# EAGLE board RotaryEncoder_Breakout (EAGLE 6.5.0)
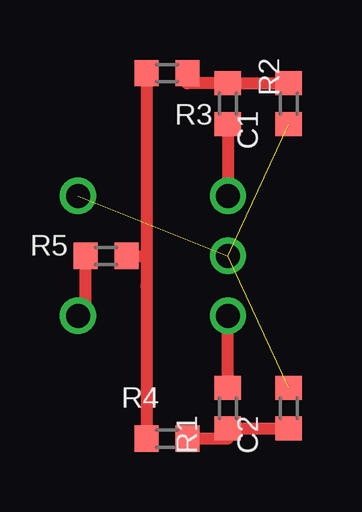
[diagram p0: board, top side]
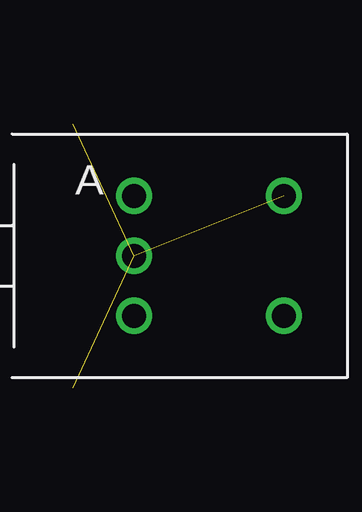
[diagram p1: board, bottom side, seen from below]

No outline drawn. Coordinates in mm, seen from the top.
Copper layers (1*16): Top 0.035mm / dielectric 1.5mm / Bottom 0.035mm
Design rules "default": minimum track width 10mil, minimum drill 24mil, track to track 8mil, track to pad 8mil, pad to pad 8mil, via to via 8mil, smd to smd 8mil, copper to edge 40mil, drill to drill 8mil, minimum pad ring 10mil, minimum via ring 8mil, stop-mask expansion 4mil, vias tented up to drill 0mil, thermal gap 10mil

## Footprints (pad centres in the part's own frame; a part is rotated, then mirrored left to right if it is on the bottom)
0603 = smd 1 x 1.1: 1 -0.85,0; 2 0.85,0
PEC092320FS = drill 1: A 0,-2.5; B 0,2.5; C 0,0; D -6.25,-2.5; E -6.25,2.5

## Placement (x,y rotation side)
C1  10nF  [0603]  2.54,6.35 90 top
C2  10nF  [0603]  2.54,-6.35 90 top
ENC1  PEC09  [PEC092320FS]  0,0 180 bottom
R1  10k  [0603]  0,-6.35 90 top
R2  10k  [0603]  0,6.35 270 top
R3  10k  [0603]  -2.54,7.62 180 top
R4  10k  [0603]  -2.54,-7.62 0 top
R5  10k  [0603]  -5.08,0 0 top

## Library data of the parts
C1 C2 R1-R5 = rlc-jqi
ENC1 = connector-jqi

## Nets
ENC_A: C1.2 R2.1 R3.1
ENC_B: C2.1 R1.1 R4.2
ENC_SW: ENC1.E R5.1
GND: C1.1 C2.2 ENC1.C ENC1.D
N$4: ENC1.B R1.2
N$5: ENC1.A R2.2
V+: R3.2 R4.1 R5.2

## Tracks (layer width: path | path; a pad name or v marks a point on that pad's centre or on a via)
ENC_A
  Top 0.508: C1.2 R2.1 -1.69,7.2 R3.1
ENC_B
  Top 0.508: R4.2 0,-7.62 R1.1 C2.1
ENC_SW
  Top 0.508: ENC1.E -5.93,-2.5 R5.1
GND  (3 unrouted)
N$4
  Top 0.508: R1.2 ENC1.B
N$5
  Top 0.508: R2.2 ENC1.A
V+
  Top 0.508: R5.2 -3.39,0 | -3.39,0 -3.39,-1.27 R4.1 | R3.2 -3.39,0